# Altium PCB PCB1.PcbDoc
Units mm, origin at the board's own origin, x right, y up, seen from the top; angles counter-clockwise.
Board outline 152.4 x 101.6 mm, 2 copper layers (Top Layer, Bottom Layer); 42 components, 27 nets, 121 pads, 0 vias.
Unrouted connection lines stored in the file: 93.
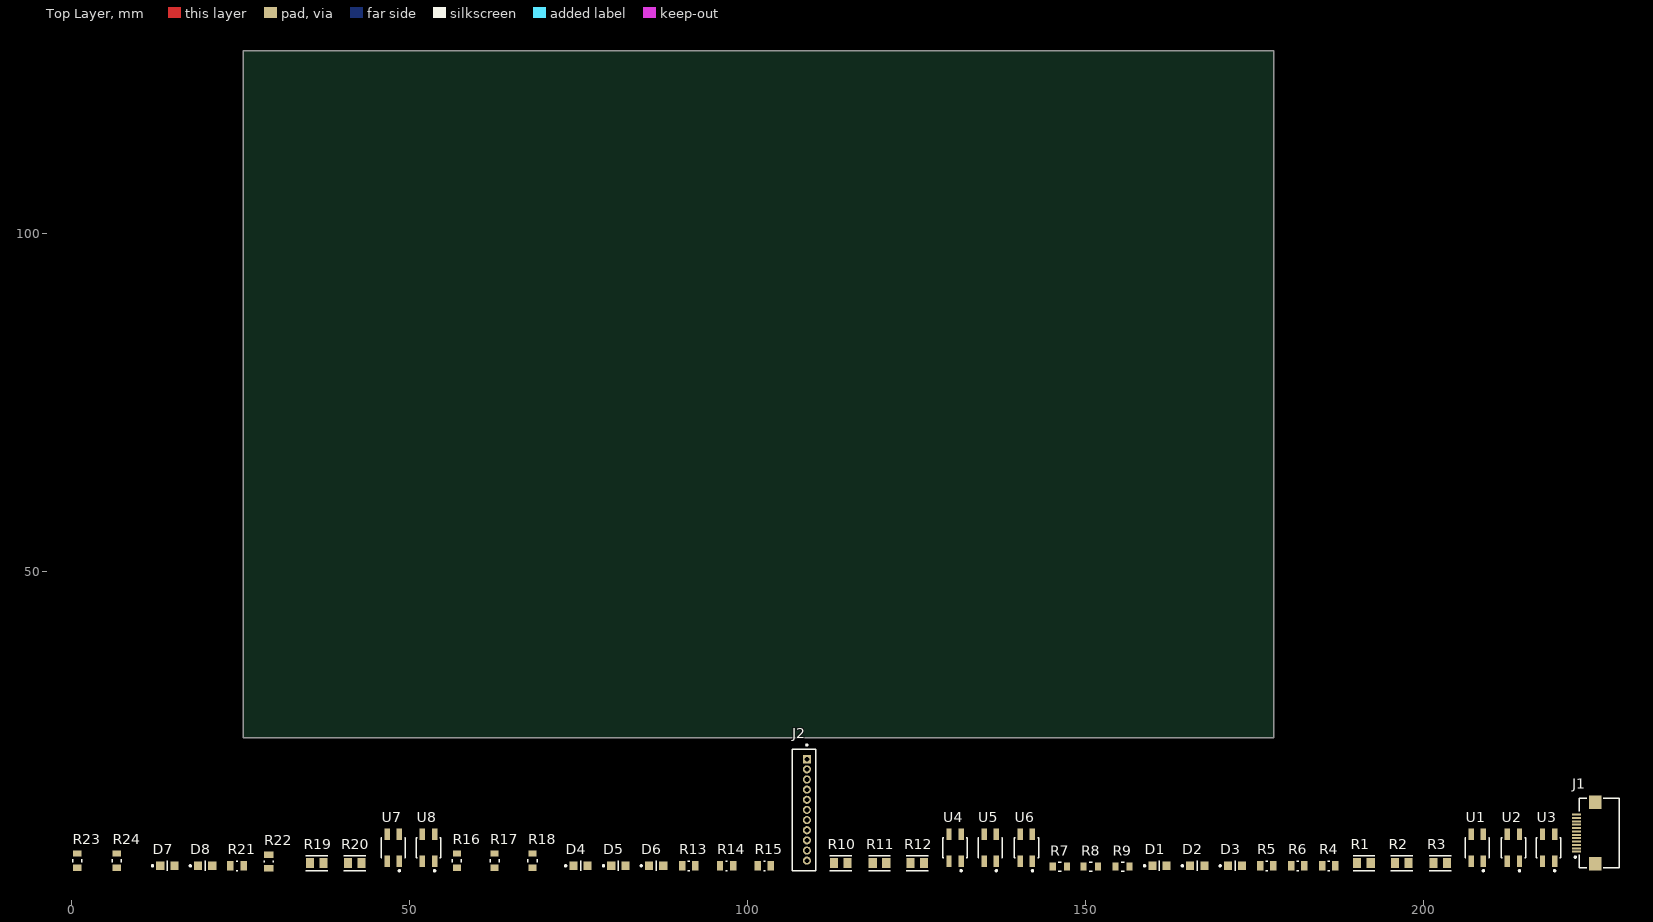
[diagram p0: Top Layer view]
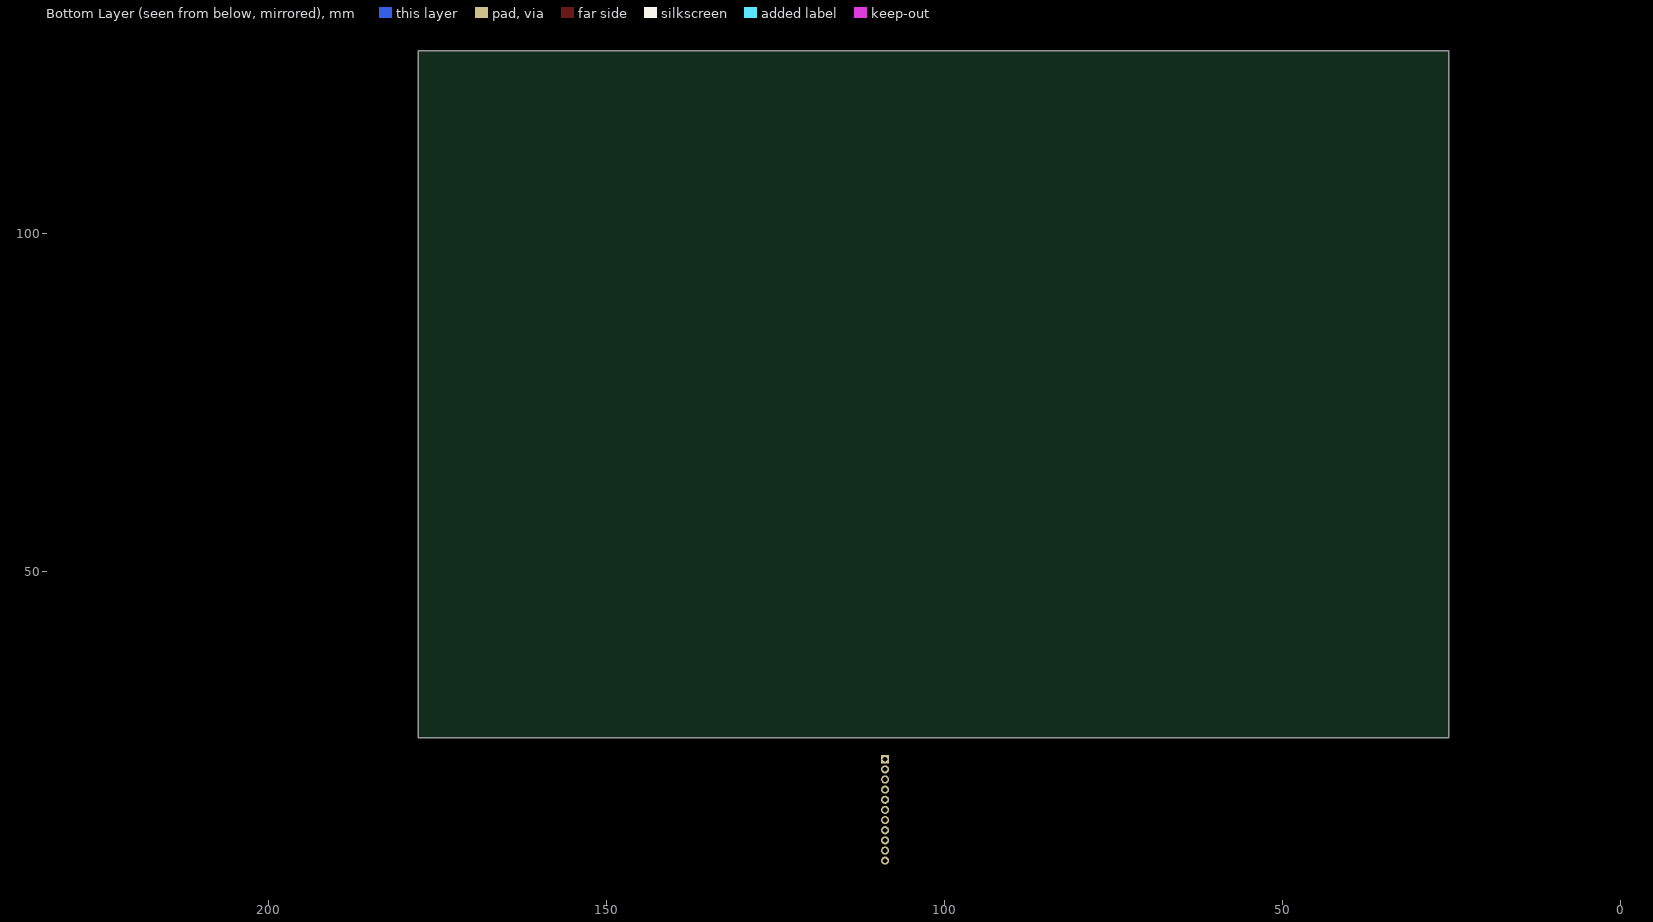
[diagram p1: Bottom Layer view, seen from below]

## Layer stack, top to bottom
Top Solder: solder mask 0.0102, Solder Resist, Dk 3.5
Top Layer: signal copper 0.0356
Dielectric 1: dielectric 0.32, FR-4, Dk 4.8
Bottom Layer: signal copper 0.0356
Bottom Solder: solder mask 0.0102, Solder Resist, Dk 3.5

## Board outline
25.4,25.4 177.8,25.4 177.8,127 25.4,127

## Design rules (kind name [scope] priority, off if disabled: settings)
Clearance [All] p1: gap=0.254 ignorepadtopadclearanceinfootprint=FALSE
PolygonConnect [All] p1: connectstyle=Relief reliefconductorwidth=0.254 reliefentries=4 polygonreliefangle="90 Angle" airgapwidth=0.254
RoutingVias [All] p1: holewidth=0.711 width=1.27 viastyle="Through Hole" minholewidth=0.711 minwidth=1.27 maxholewidth=0.711 maxwidth=1.27
SolderMaskExpansion [All] p1: expansion=0 istentingtop=FALSE
SupplyNets "Schematic Supply Nets_2" [InNet('+3V3')] p1: voltage=0.000
SupplyNets "Schematic Supply Nets_1" [InNet('GND')] p2: voltage=0.000
SupplyNets "Schematic Supply Nets" [InNet('IR')] p3: voltage=0.000
Width [All] p1: maxlimit=0.254 minlimit=0.254 preferedwidth=0.254
30 further rules are at their usual default settings.

## Components (designator, comment, footprint, x,y, rotation, side; value= is the part's Value field where it differs from the comment)
D1 "WHITE" FP-SML-LX0805UWC-TR-MFG 160.896,6.477 r0 top
D2 "WHITE" FP-SML-LX0805UWC-TR-MFG 166.484,6.477 r0 top
D3 "WHITE" FP-SML-LX0805UWC-TR-MFG 172.072,6.477 r0 top
D4 "WHITE" FP-SML-LX0805UWC-TR-MFG 75.298,6.477 r0 top
D5 "WHITE" FP-SML-LX0805UWC-TR-MFG 80.886,6.477 r0 top
D6 "WHITE" FP-SML-LX0805UWC-TR-MFG 86.474,6.477 r0 top
D7 "WHITE" FP-SML-LX0805UWC-TR-MFG 14.211,6.477 r0 top
D8 "WHITE" FP-SML-LX0805UWC-TR-MFG 19.799,6.477 r0 top
J1 "687112149022" 687112149022 225.92,11.303 r90 top
J2 "B11B-ZR(LF)(SN)" FP-B11B-ZR_LF_SN-MFG 108.318,14.732 r90 top
R1 "100R" FP-AF0805-IPC_A 191.122,6.858 r0 top
R2 "100R" FP-AF0805-IPC_A 196.71,6.858 r0 top
R3 "100R" FP-AF0805-IPC_A 202.425,6.858 r0 top
R4 "100k" FP-CRCW0805-HPe3-MFG 185.915,6.477 r0 top
R5 "100k" FP-CRCW0805-HPe3-MFG 176.771,6.477 r0 top
R6 "100k" FP-CRCW0805-HPe3-MFG 181.343,6.477 r0 top
R7 "220R" FP-AC0805-MFG 146.164,6.35 r0 top value=220Ω
R8 "220R" FP-AC0805-MFG 150.736,6.35 r0 top value=220Ω
R9 "220R" FP-AC0805-MFG 155.435,6.35 r0 top value=220Ω
R10 "100R" FP-AF0805-IPC_A 113.779,6.858 r0 top
R11 "100R" FP-AF0805-IPC_A 119.494,6.858 r0 top
R12 "100R" FP-AF0805-IPC_A 125.082,6.858 r0 top
R13 "100k" FP-CRCW0805-HPe3-MFG 91.3,6.477 r0 top
R14 "100k" FP-CRCW0805-HPe3-MFG 96.888,6.477 r0 top
R15 "100k" FP-CRCW0805-HPe3-MFG 102.476,6.477 r0 top
R16 "220R" FP-AC0805-MFG 57.01,7.239 r90 top value=220Ω
R17 "220R" FP-AC0805-MFG 62.598,7.239 r90 top value=220Ω
R18 "220R" FP-AC0805-MFG 68.186,7.239 r90 top value=220Ω
R19 "100R" FP-AF0805-IPC_A 36.309,6.858 r0 top
R20 "100R" FP-AF0805-IPC_A 41.897,6.858 r0 top
R21 "100k" FP-CRCW0805-HPe3-MFG 24.498,6.477 r0 top
R22 "100k" FP-CRCW0805-HPe3-MFG 29.197,7.112 r90 top
R23 "220R" FP-AC0805-MFG 0.876,7.239 r90 top value=220Ω
R24 "220R" FP-AC0805-MFG 6.718,7.239 r90 top value=220Ω
U1 "QRE1113GR" FP-100CY-MFG 207.886,9.144 r90 top
U2 "QRE1113GR" FP-100CY-MFG 213.22,9.144 r90 top
U3 "QRE1113GR" FP-100CY-MFG 218.427,9.144 r90 top
U4 "QRE1113GR" FP-100CY-MFG 130.67,9.144 r90 top
U5 "QRE1113GR" FP-100CY-MFG 135.877,9.144 r90 top
U6 "QRE1113GR" FP-100CY-MFG 141.211,9.144 r90 top
U7 "QRE1113GR" FP-100CY-MFG 47.612,9.144 r90 top
U8 "QRE1113GR" FP-100CY-MFG 52.819,9.144 r90 top

## Footprints (in the part's own frame and the unit in brackets; to place one, negate y for a bottom-side part, rotate by r counter-clockwise, add the part's x,y. Pads: shape width x height; smd on the part's side, far side on the other; paste and mask are expansions set on the pad)
687112149022 [mm] "0.50mm SMT ZIF Horizontal Hinge Type Bottom Contact, 12p"
  rect 0.3x1.3 smd: 1(-2.75,3.35) 2(-2.25,3.35) 3(-1.75,3.35) 4(-1.25,3.35) 5(-0.75,3.35) 6(-0.25,3.35) 7(0.25,3.35) 8(0.75,3.35) 9(1.25,3.35) 10(1.75,3.35) 11(2.25,3.35) 12(2.75,3.35)
  rect 2x1.8 smd: M1(-4.55,0.6) M2(4.55,0.6)
  silkscreen extent -5.12,-2.98 5.13,3.67, body extent -5.05,-2.9 5.05,3.6, height 2.25
FP-100CY-MFG [mm]
  rect 1.66x0.79 smd paste+0 mask+0: 1(-2,-0.9) 2(2,-0.9) 3(2,0.9) 4(-2,0.9)
  silkscreen extent -3.52,-1.8 1.45,1.8, body extent -2.93,-1.9 2.93,1.9, height 0.25
FP-AC0805-MFG [mm]
  rect 0.9x1.2 smd paste+0 mask+0: 1(-1.05,0) 2(1.05,0)
  silkscreen extent -0.23,-0.67 0.23,0.67, body extent -1.6,-0.77 1.6,0.77, height 0.25
FP-AF0805-IPC_A [mm]
  rect 1.208x1.462 smd paste+0 mask+0: 1(-1.002,0) 2(1.002,0)
  silkscreen extent -1.61,-1.13 1.61,1.13, body extent -2.11,-1.23 2.11,1.23, height 0.25
FP-B11B-ZR_LF_SN-MFG [mm]
  rect 1.2x1.2 hole 0.7 paste-2539.97 mask+0: 1(7.5,-0.45)
  round 1.2 hole 0.7 paste-2539.97 mask+0: 2(6,-0.45) 3(4.5,-0.45) 4(3,-0.45) 5(1.5,-0.45) 6(0,-0.45) 7(-1.5,-0.45) 8(-3,-0.45) 9(-4.5,-0.45) 10(-6,-0.45) 11(-7.5,-0.45)
  silkscreen extent -9,-1.75 9.72,1.75, body extent -9.1,-1.85 9.1,1.85, height 0.25
FP-CRCW0805-HPe3-MFG [mm]
  rect 0.95x1.45 smd paste+0 mask+0: 1(-0.975,0) 2(0.975,0)
  silkscreen extent -0.13,-0.7 0.13,0.7, body extent -1.55,-0.82 1.55,0.82, height 0.25
FP-SML-LX0805UWC-TR-MFG [mm]
  rect 1.2x1.2 smd paste+0 mask+0: 1(-1.05,0) 2(1.05,0)
  silkscreen extent -2.32,-0.75 0,0.75, body extent -1.75,-0.85 1.75,0.85, height 0.25

## Part data
D1 D2 D3 D4 D5 D6 D7 D8: library part CMP-00229-00139794-1, "SML-LX0805UWC-TR White LED, 0805 Diffused, Rectangle Lens SMD package", Case/Package=0805, Forward Current=20mA, Forward Voltage=3.5V, Illumination Color=White, Lens Color="Clear, Yellow", Max Operating Temperature=85°C, Min Operating Temperature=-40°C, Power Rating=120mW, Approvals="CSA, UL", Luminous Intensity=150mcd, Mount="Surface Mount", NexarPartId=139794, Number of LEDs=1, RoHS=Compliant, Viewing Angle=120°
J1: library part CMP-1502-01626-3, "FFC/FPC Connector, 12 Contact(s), 1 Row(s), Female, Right Angle, Surface Mount Terminal", Contact Resistance=50mΩ, Current Rating=500mA, Flammability Rating="UL94 V-0", Insulation Resistance=500MΩ, Max Operating Temperature=105°C, Min Operating Temperature=-40°C, Operating Supply Voltage=50V, Actuator Material="Nylon, Polyamide", Contact Material=Bronze, Contact Plating=Tin, Gender=Receptacle, Lead Pitch=500µm, Length=6.6mm, Mount="Surface Mount", Number of Contacts=12, Number of Pins=12, Number of Positions=12, Number of Rows=1, Orientation=Horizontal, Packaging="Tape and Reel", Pitch=500µm, REACH SVHC=Unknown, RoHS=Compliant, Termination=Solder, Voltage Rating=50V, Wire/Cable Type=Straight
J2: library part CMP-00504-00248830-1, "B11B-ZR(LF)(SN) Wire-To-Board Connector, Zh Series, Press Fit, Header, 11, 1.5 Mm, Tin Plated Contacts", Color=Natural, Current Rating=700mA, Max Operating Temperature=85°C, Min Operating Temperature=-25°C, Voltage Rating=50V, Connector Type="Male Pin", Contact Material="Brass, Tin", Contact Mating Length=2.3876mm, Contact Plating=Tin, Fastening Type=Detent, Gender=Male, Height=4.5mm, Housing Color=Natural, Housing Material=Nylon, Lead Free="Lead Free", Lead Pitch=1.5mm, Mount="Through Hole", NexarPartId=248830, Number of Contacts=11, Number of Positions=11, Number of Rows=1, Packaging=Bulk, Pitch=1.4986mm, RoHS=Compliant, Termination=Press-Fit
R1 R2 R3 R10 R11 R12 R19 R20: library part CMP-03412-047342-1, "Anti-Sulfurated Chip Resistor Automotive Grade 100Ω 5% 0.125W ±100ppm/°C 0805", Case/Package=0805, Max Operating Temperature=155°C, Max Power Dissipation=125mW, Min Operating Temperature=-55°C, Resistor Type="Thick Film", Temperature Coefficient=100ppm/°C, Tolerance=5%, Features="Moisture Resistant", Height=0.024inch, Length=0.079inch, Number of Terminations=2, Packaging="Tape and Reel", Resistance=100R, RoHS Compliant=Yes, Series=AF, Width=0.049inch
R4 R5 R6 R13 R14 R15 R21 R22: library part CMP-02407-010180-1, "RES Thick Film, 100kΩ, 5%, 0.5W, 200ppm/°C, 0805", Case Code (Imperial)=0805, Case Code (Metric)=2012, Max Operating Temperature=155°C, Max Power Dissipation=333mW, Min Operating Temperature=-55°C, Package Quantity=1, Power Rating=330mW, Resistance=100kR, Temperature Coefficient=200ppm/°C, Tolerance=5%, Voltage Rating=150V, Case/Package=0805, Composition="Thick Film", Contact Plating=Tin, Features="Automotive AEC-Q200", Height=0.02inch, Lead Free="Lead Free", Length=2mm, Mount="Surface Mount", Number of Terminations=2, Packaging="Tape and Reel", Radiation Hardening=No, Termination=SMD/SMT, Weight=0.000194oz, Width=0.049inch
R7 R8 R9 R16 R17 R18 R23 R24: library part CMP-03412-037443-1, "RES SMD 220 OHM 5% 1/8W 0805", Manufacturer=Yageo, Manufacturer Part Number=AC0805JR-07220RL, Package=AC0805, Power Rating=1/8W, Resistance=220Ω, Temperature="-55°C to +155°C", Temperature Range High=+155°C, Temperature Range Low=-55°C, Tolerance=0.05, Voltage Rating=150V, Automotive=Yes, Automotive Grade="Grade 0", Category=Res, ComponentLink2Description=Datasheet, ComponentLink2URL=http://www.yageo.com/documents/recent/PYu-AC_51_RoHS_L_6.pdf, Composition="Thick Film", Device Class L1="Passive Components", Device Class L2=Resistors, Device Class L3="Chip SMD Resistors", Digikey Description="RES SMD 220 OHM 5% 1/8W 0805", Footprint Url=http://www.yageo.com/exep/pages/download/literatures/PYu-R_Mount_10.pdf, Height=0.6mm, Ipc Land Pattern Name=RESC200125X50, Lead Free=Yes, Mouser Description="Res Thick Film 0805 220 Ohm 5% 1/8W ±100ppm/°C Molded SMD Paper T/R", Octopart=https://octopart.com/ac0805jr-07220rl-yageo-30510975, RoHS=TRUE, Series=AC
U1 U2 U3 U4 U5 U6 U7 U8: library part CMP-2000-06919-2, "SENSOR OPTO TRANS REFL SMD PHOTO", Case/Package=SMD/SMT, Collector Emitter Breakdown Voltage=30V, Forward Current=50mA, Forward Voltage=1.2V, Max Collector Current=20mA, Max Operating Temperature=85°C, Max Power Dissipation=75mW, Min Operating Temperature=-40°C, Operating Supply Voltage=1.7V, Package Quantity=1000, Reverse Breakdown Voltage=5V, Collector Emitter Voltage (VCEO)=30V, Contact Plating=Tin, Fall Time=20us, Height=1.7mm, Input Current=50mA, Lead Free="Lead Free", Length=3.6mm, Max Breakdown Voltage=30V, Mount="Surface Mount", Number of Channels=1, Number of Elements=1, Number of Pins=4, Output Type=Phototransistor, Packaging="Tape and Reel", Power Dissipation=75mW, Radiation Hardening=No, REACH SVHC="No SVHC", Response Time=20us, Reverse Voltage (DC)=5V, Rise Time=20us, Sensing Distance=0.197inch, Wavelength=940nm, Weight=0.078g, Width=2.9mm

## Nets (pads, with @x,y where several pads share a name; then routed paths per layer and width w, separated by ;. In a path a pad name is that pad's centre, name@x,y a point inside that pad or via, vN(x,y) a via of type N, cw(c..) or ccw(c..) an arc to the next point about the centre after c; other vN are vias at no path point)
+3V3: D1.2 D2.2 D3.2 D4.2 D5.2 D6.2 D7.2 D8.2 J1.11 J2.11 R5.2 R6.2 R13.2 R14.2 R15.2 R21.2 R22.2
A0: J1.3 J2.9 R5.1 U1.3
A1: J1.4 J2.8 R6.1 U2.3
A2: J1.5 J2.7 R4.1 U3.3
A3: J1.6 J2.6 R13.1 U4.3
A4: J1.7 J2.5 R14.1 U5.3
A5: J1.8 J2.4 R15.1 U6.3
A6: J1.9 J2.3 R21.1 U7.3
A7: J1.10 J2.2 R22.1 U8.3
GND: J1.1 J1.12 J1.M1 J1.M2 J2.1 R7.2 R8.2 R9.2 R16.2 R17.2 R18.2 R23.2 R24.2 U1.2 U1.4 U2.2 U2.4 U3.2 U3.4 U4.2 U4.4 U5.2 U5.4 U6.2 U6.4 U7.2 U7.4 U8.2 U8.4
IR: J1.2 J2.10 R1.2 R2.2 R3.2 R10.2 R11.2 R12.2 R19.2 R20.2
NetD1_1: D1.1 R7.1
NetD2_1: D2.1 R8.1
NetD3_1: D3.1 R9.1
NetD4_1: D4.1 R16.1
NetD5_1: D5.1 R17.1
NetD6_1: D6.1 R18.1
NetD7_1: D7.1 R23.1
NetD8_1: D8.1 R24.1
NetR1_1: R1.1 U1.1
NetR2_1: R2.1 U2.1
NetR3_1: R3.1 U3.1
NetR10_1: R10.1 U4.1
NetR11_1: R11.1 U5.1
NetR12_1: R12.1 U6.1
NetR19_1: R19.1 U7.1
NetR20_1: R20.1 U8.1
pads on no net: R4.2